# EAGLE board X_Driver (EAGLE 6.1)
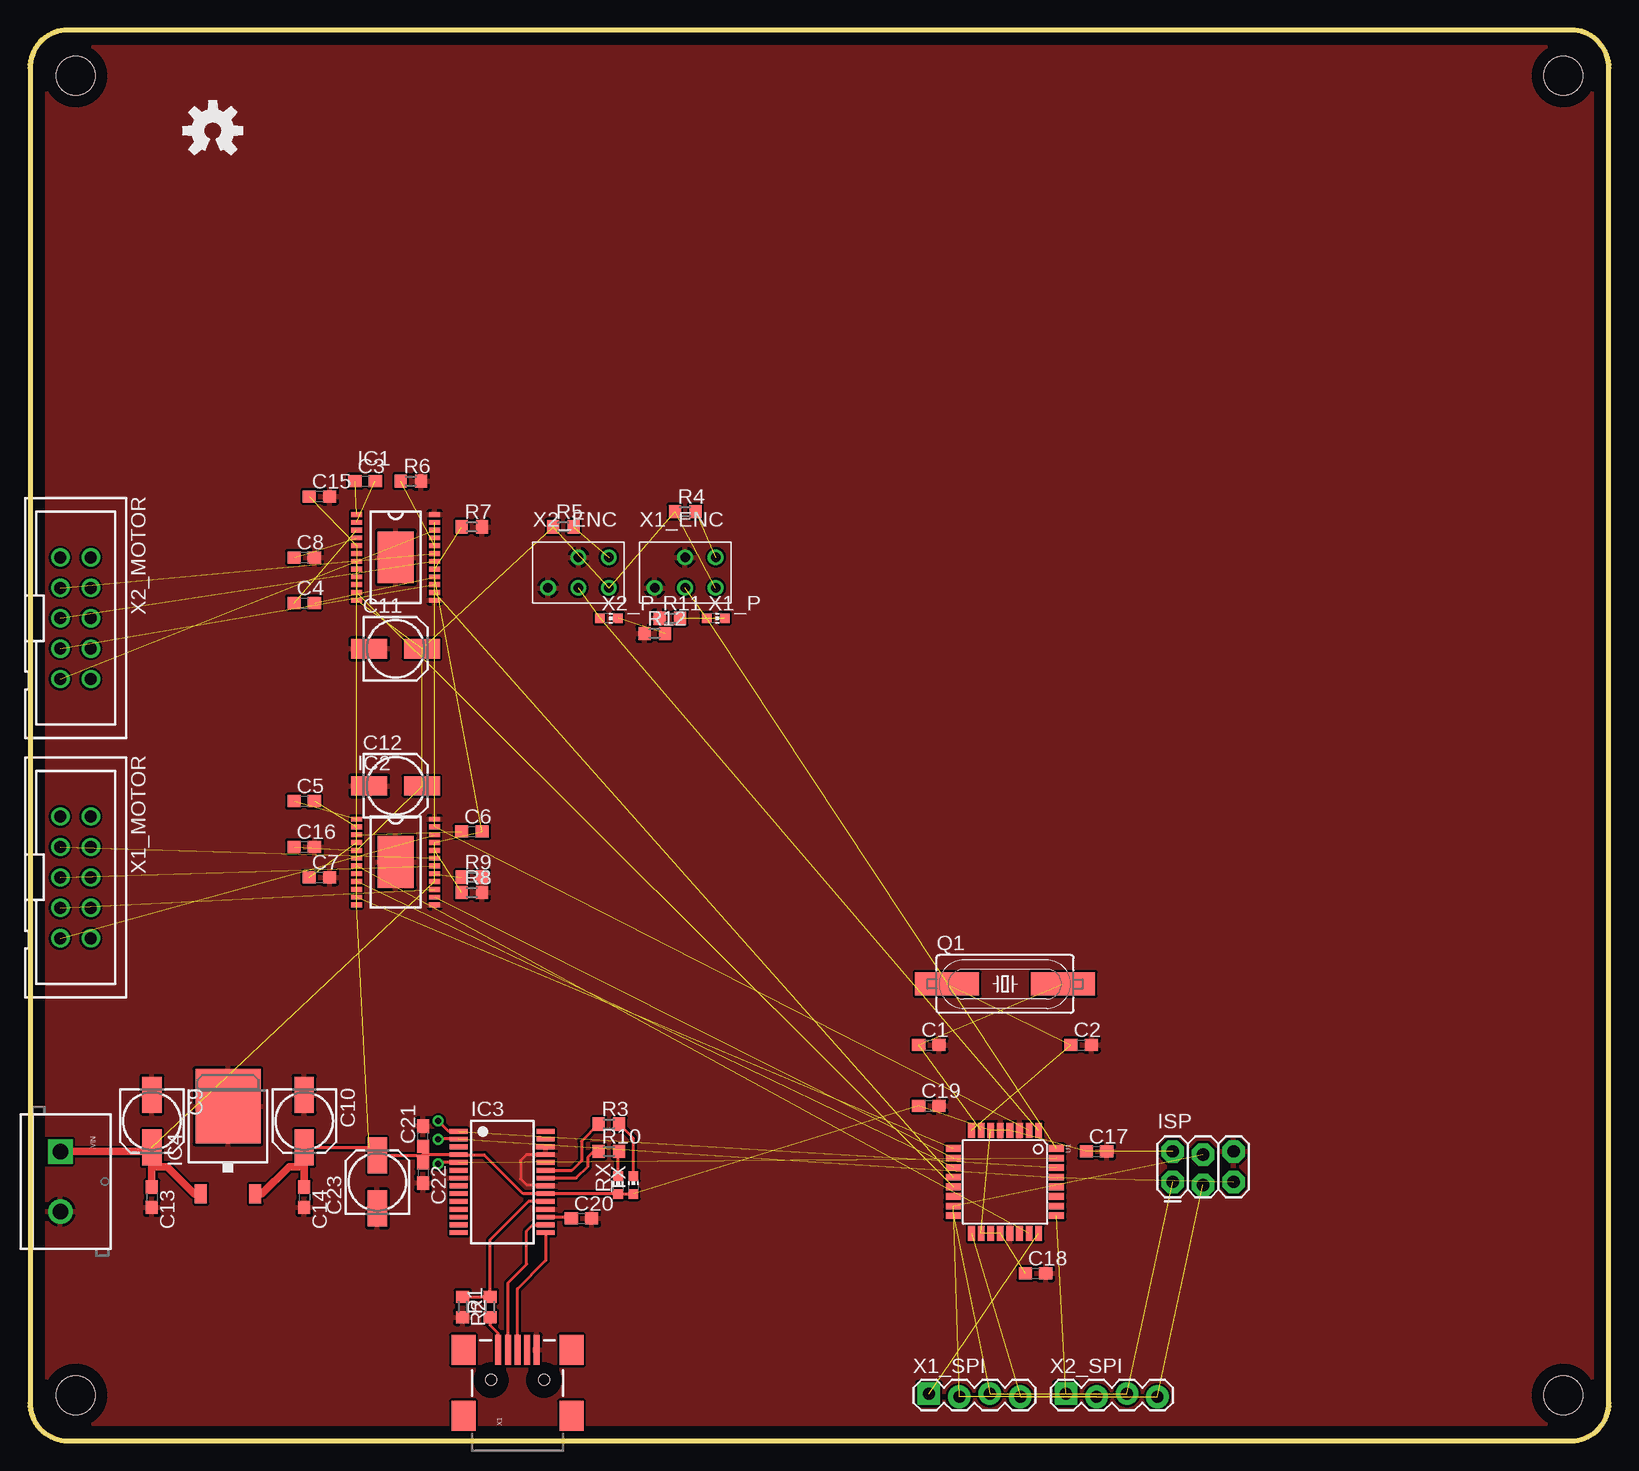
[diagram p0: board, top side]
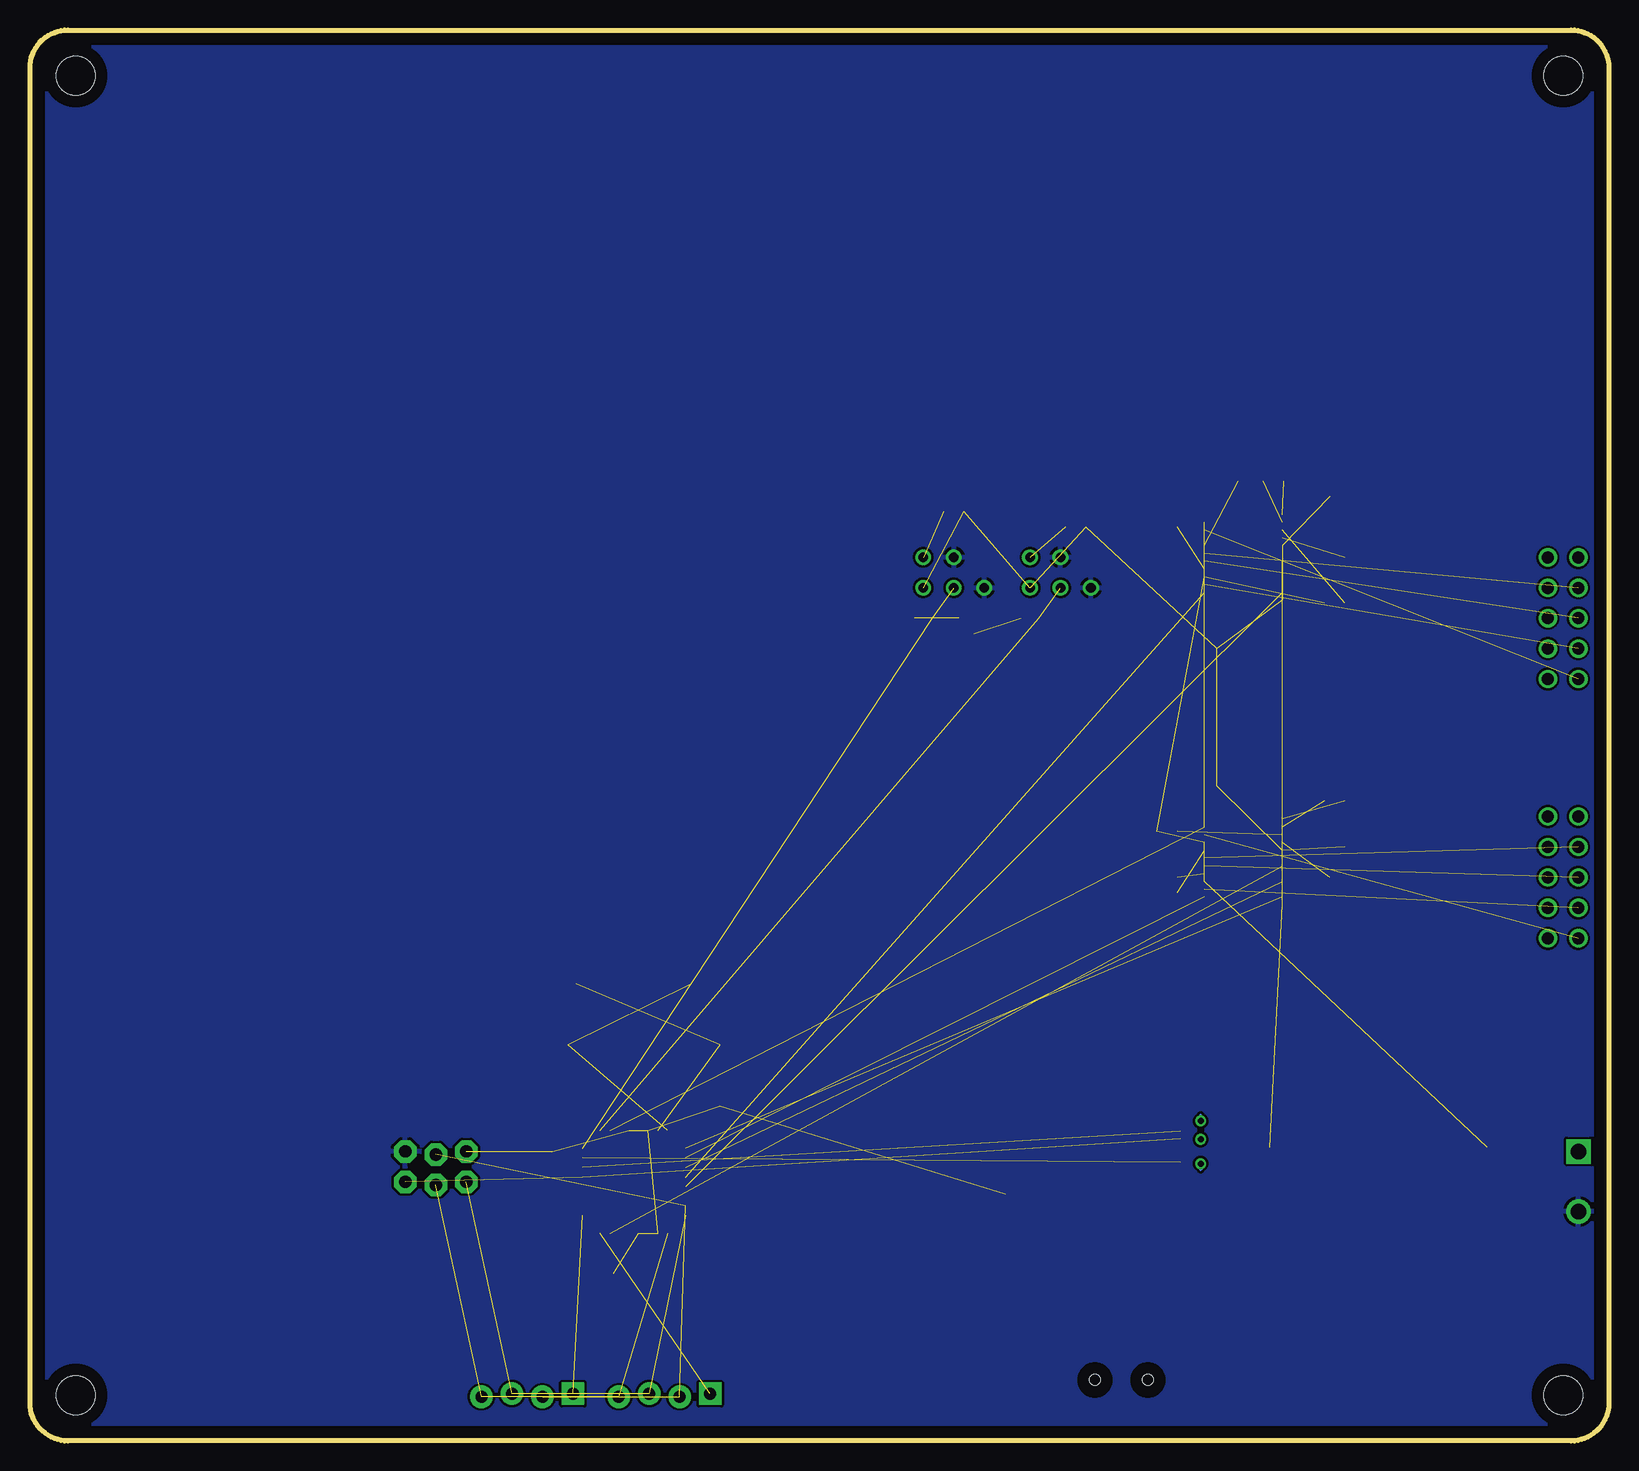
[diagram p1: board, bottom side, seen from below]

Size 131.62 x 117.62 mm. Coordinates in mm from the lower left corner, seen from the top.
Outline: 0,114.44 0,3.17 arc90 3.17,0 128.44,0 arc90 131.62,3.17 131.62,114.44 arc90 128.44,117.62 3.17,117.62 arc90 0,114.44
Copper layers (1*16): Top 0.035mm / dielectric 1.5mm / Bottom 0.035mm
Design rules: minimum track width 10mil, minimum drill 24mil, track to track 8mil, track to pad 8mil, pad to pad 8mil, via to via 8mil, smd to smd 8mil, copper to edge 40mil, drill to drill 8mil, minimum pad ring 10mil, minimum via ring 8mil, stop-mask expansion 4mil, vias tented up to drill 0mil, thermal gap 10mil
Holes 3.2 mm at 3.81,3.81 127.81,3.81 3.81,113.81 127.81,113.81

## Footprints (pad centres in the part's own frame; a part is rotated, then mirrored left to right if it is on the bottom)
C0603 = smd 1.1 x 1: 1 -0.85,0; 2 0.85,0
153CLV-0505 = smd 3 x 1.6: + 2.2,0; - -2.2,0
24TSSOP = smd 0.9 x 0.4: 1 -3.25,3.575; 2 -3.25,2.925; 3 -3.25,2.275; 4 -3.25,1.625; 5 -3.25,0.975; 6 -3.25,0.325; 7 -3.25,-0.325; 8 -3.25,-0.975; 9 -3.25,-1.625; 10 -3.25,-2.275; 11 -3.25,-2.925; 12 -3.25,-3.575; 13 3.25,-3.575; 14 3.25,-2.925; 15 3.25,-2.275; 16 3.25,-1.625; 17 3.25,-0.975; 18 3.25,-0.325; 19 3.25,0.325; 20 3.25,0.975; 21 3.25,1.625; 22 3.25,2.275; 23 3.25,2.925; 24 3.25,3.575 | smd 3 x 4.32: 25 0,0
SSOP28 = smd 0.4 x 1.5: 1 -4.225,-3.625; 2 -3.575,-3.625; 3 -2.925,-3.625; 4 -2.275,-3.625; 5 -1.625,-3.625; 6 -0.975,-3.625; 7 -0.325,-3.625; 8 0.325,-3.625; 9 0.975,-3.625; 10 1.625,-3.625; 11 2.275,-3.625; 12 2.925,-3.625; 13 3.575,-3.625; 14 4.225,-3.625; 15 4.225,3.625; 16 3.575,3.625; 17 2.925,3.625; 18 2.275,3.625; 19 1.625,3.625; 20 0.975,3.625; 21 0.325,3.625; 22 -0.325,3.625; 23 -0.975,3.625; 24 -1.625,3.625; 25 -2.275,3.625; 26 -2.925,3.625; 27 -3.575,3.625; 28 -4.225,3.625
TO252 = smd 1 x 1.6: 1 -2.28,-4.8; 2 2.28,-4.8 | smd 5.4 x 6.2: 3 0,2.5
2X3_LOCK = drill 1.016 pad 1.88 octagon: 1 0,0; 2 0,2.54; 3 2.54,-0.254; 4 2.54,2.286; 5 5.08,0; 6 5.08,2.54
HC49UP = smd 5.334 x 1.93: 1 -4.826,0; 2 4.826,0
R0603 = smd 1 x 1.1: 1 -0.85,0; 2 0.85,0
CHIP-LED0603 = smd 0.8 x 0.8: A 0,-0.75; C 0,0.75
TQFP32-08 = smd 1.27 x 0.559: 1 -4.293,2.8; 2 -4.293,2; 3 -4.293,1.2; 4 -4.293,0.4; 5 -4.293,-0.4; 6 -4.293,-1.2; 7 -4.293,-2; 8 -4.293,-2.8; 17 4.293,-2.8; 18 4.293,-2; 19 4.293,-1.2; 20 4.293,-0.4; 21 4.293,0.4; 22 4.293,1.2; 23 4.293,2; 24 4.293,2.8 | smd 0.559 x 1.27: 9 -2.8,-4.293; 10 -2,-4.293; 11 -1.2,-4.293; 12 -0.4,-4.293; 13 0.4,-4.293; 14 1.2,-4.293; 15 2,-4.293; 16 2.8,-4.293; 25 2.8,4.293; 26 2,4.293; 27 1.2,4.293; 28 0.4,4.293; 29 -0.4,4.293; 30 -1.2,4.293; 31 -2,4.293; 32 -2.8,4.293
SCREWTERMINAL-5MM-2 = drill 1.3 pad 2.032 square: 1 0,0 | drill 1.3 pad 2.032: 2 5,0
USB-MINIB = smd 2.5 x 0.5: D+ 2.5,0; D- 2.5,0.8; GND 2.5,-1.6; ID 2.5,-0.8; VBUS 2.5,1.6 | smd 2.5 x 2: MTN1 -3,4.5; MTN2 2.5,4.5; MTN3 -3,-4.5; MTN4 2.5,-4.5 | hole 0.9: 0,2.2; 0,-2.2
OPB990P51 = drill 0.8: 2 -2.54,-1.27; 3 0,1.27; 4 0,-1.27; 5 2.54,1.27; 6 2.54,-1.27
2X5_SHROUDED = drill 1 pad 1.422: 1 -5.08,-1.27; 2 -5.08,1.27; 3 -2.54,-1.27; 4 -2.54,1.27; 5 0,-1.27; 6 0,1.27; 7 2.54,-1.27; 8 2.54,1.27; 9 5.08,-1.27; 10 5.08,1.27
1X04_LOCK = drill 1.016 pad 1.88 square: 1 0,0.127 | drill 1.016 pad 1.88: 2 2.54,-0.127; 3 5.08,0.127; 4 7.62,-0.127

## Placement (x,y rotation side)
C1  20pF  [C0603]  74.93,33.02 0 top
C2  20pF  [C0603]  87.63,33.02 0 top
C3  0.1uF  [C0603]  27.94,80.01 0 top
C4  0.1uF  [C0603]  22.86,69.85 0 top
C5  0.1uF  [C0603]  22.86,53.34 0 top
C6  0.1uF  [C0603]  36.83,50.8 0 top
C7  0.22uF  [C0603]  24.13,46.99 0 top
C8  0.22uF  [C0603]  22.86,73.66 0 top
C9  100uF  [153CLV-0505]  10.16,26.67 270 top
C10  100uF  [153CLV-0505]  22.86,26.67 270 top
C11  100uF  [153CLV-0505]  30.48,66.04 0 top
C12  100uF  [153CLV-0505]  30.48,54.61 0 top
C13  0.1uF  [C0603]  10.16,20.32 270 top
C14  0.1uF  [C0603]  22.86,20.32 270 top
C15  0.1uF  [C0603]  24.13,78.74 0 top
C16  0.1uF  [C0603]  22.86,49.53 0 top
C17  0.1uF  [C0603]  88.9,24.13 0 top
C18  0.1uF  [C0603]  83.82,13.97 0 top
C19  0.1uF  [C0603]  74.93,27.94 0 top
C20  0.1uF  [C0603]  45.97,18.54 0 top
C21  0.1uF  [C0603]  32.77,25.4 90 top
C22  0.1uF  [C0603]  32.77,22.35 270 top
C23  4.7uF  [153CLV-0505]  28.96,21.59 90 top
IC1  A4982  [24TSSOP]  30.48,73.66 0 top
IC2  A4982  [24TSSOP]  30.48,48.26 0 top
IC3  FT232RL  [SSOP28]  39.37,21.59 270 top
IC4  7805DT  [TO252]  16.51,25.4 0 top
ISP  AVR_SPI_PRG_62X3_LOCK  [2X3_LOCK]  95.25,21.59 0 top
Q1  20MHz  [HC49UP]  81.28,38.1 0 top
R1  4.7k  [R0603]  38.35,11.18 90 top
R2  10k  [R0603]  36.07,11.18 270 top
R3  270  [R0603]  48.26,26.42 0 top
R4  220  [R0603]  54.61,77.47 0 top
R5  220  [R0603]  44.45,76.2 0 top
R6  1ohm 0.25W  [R0603]  31.75,80.01 0 top
R7  1ohm 0.25W  [R0603]  36.83,76.2 0 top
R8  1ohm 0.25W  [R0603]  36.83,45.72 0 top
R9  1ohm 0.25W  [R0603]  36.83,46.99 0 top
R10  270  [R0603]  48.26,24.13 0 top
R11  270  [R0603]  53.34,68.58 0 top
R12  270  [R0603]  52.07,67.31 0 top
RX  red  [CHIP-LED0603]  49.02,21.34 0 top
TX  green  [CHIP-LED0603]  50.29,21.34 0 top
U1  ATMEGA168  [TQFP32-08]  81.28,21.59 270 top
U$1  OSHW-LOGOM  [OSHW-LOGO-M]  15.24,109.22 0 top
VIN  [SCREWTERMINAL-5MM-2]  2.54,24.13 270 top
X1  USBSMD  [USB-MINIB]  40.64,5.08 90 top
X1_ENC  OPB990P51  [OPB990P51]  54.61,72.39 0 top
X1_MOTOR  X_STEPPER  [2X5_SHROUDED]  3.81,46.99 270 top
X1_P  yellow  [CHIP-LED0603]  57.15,68.58 270 top
X1_SPI  [1X04_LOCK]  74.93,3.81 0 top
X2_ENC  OPB990P51  [OPB990P51]  45.72,72.39 0 top
X2_MOTOR  X_STEPPER  [2X5_SHROUDED]  3.81,68.58 270 top
X2_P  yellow  [CHIP-LED0603]  48.26,68.58 270 top
X2_SPI  [1X04_LOCK]  86.36,3.81 0 top

## Library data of the parts
C1-C23 R1-R12 = rcl
IC1 IC2 X1_ENC X1_MOTOR X2_ENC X2_MOTOR = i3_Pick_Place
IC3 = ftdichip; MPN: FT232RL; OC_FARNELL: 1146032; OC_NEWARK: 91K9918
IC4 = linear
ISP U1 U$1 VIN X1 X1_SPI X2_SPI = SparkFun
Q1 = crystal; OC_FARNELL: unknown; OC_NEWARK: unknown
RX TX X1_P X2_P = adafruit

## Nets
12VDC: C4.2 C6.2 C9.+ C13.1 IC1.16 IC1.21 IC2.16 IC2.21 IC4.1 VIN.1
GND: C1.2 C2.2 C7.2 C8.2 C9.- C10.- C11.- C12.- C13.2 C14.2 C15.2 C16.2 C17.2 C18.2 C19.2 C20.2 C21.2 C22.2 C23.- IC1.13 IC1.24 IC1.25 IC2.13 IC2.24 IC2.25 IC3.7 IC3.18 IC3.21 IC3.25 IC3.26 IC4.3 ISP.6 R2.2 R6.2 R7.2 R8.2 R9.2 R11.1 R12.1 U1.3 U1.5 U1.21 VIN.2 X1.GND X1_ENC.2 X1_ENC.3 X2_ENC.2 X2_ENC.3
MEN: IC1.23 IC2.23 U1.2
MISO: ISP.1 U1.16 X1_SPI.3 X2_SPI.3
MOSI: ISP.4 U1.15 X1_SPI.2 X2_SPI.2
MRST: IC1.7 IC2.7 U1.23
MSLP: IC1.9 IC2.9 U1.11
N$1: C1.1 Q1.2 U1.7
N$2: C2.1 Q1.1 U1.8
N$3: C20.1 IC3.17
N$4: IC3.19 R1.2 R2.1
N$5: R1.1 X1.VBUS
N$6: R4.2 X1_ENC.5
N$7: R5.2 X2_ENC.5
N$8: IC1.18 X2_MOTOR.5
N$9: U1.1 X2_ENC.4 X2_P.A
N$10: U1.32 X1_ENC.4 X1_P.A
N$11: IC3.16 X1.D-
N$12: C5.1 IC2.1
N$13: C5.2 IC2.2
N$14: C3.1 IC1.1
N$15: C3.2 IC1.2
N$16: C4.1 IC1.3
N$17: IC1.15 X2_MOTOR.7
N$18: C6.1 IC2.3
N$19: IC1.19 X2_MOTOR.3
N$20: C8.1 IC1.4
N$21: C7.1 IC2.4
N$22: IC1.22 X2_MOTOR.9
N$23: IC2.18 X1_MOTOR.5
N$24: IC2.15 X1_MOTOR.7
N$25: IC2.22 X1_MOTOR.9
N$26: IC2.19 X1_MOTOR.3
N$27: IC3.15 X1.D+
N$28: IC3.23 R3.1
N$29: IC1.20 R6.1
N$30: IC1.17 R7.1
N$31: IC2.20 R8.1
N$32: IC2.17 R9.1
N$33: IC3.22 R10.1
N$34: R3.2 TX.C
N$35: R10.2 RX.C
N$36: R11.2 X1_P.C
N$37: R12.2 X2_P.C
RESET: IC3.2 ISP.5 U1.29
RX: IC3.1 U1.30
SCK: ISP.3 U1.17 X1_SPI.4 X2_SPI.4
TX: IC3.5 U1.31
VCC: C10.+ C11.+ C12.+ C14.1 C15.1 C16.1 C17.1 C18.1 C19.1 C21.1 C22.1 C23.+ IC1.5 IC1.6 IC1.8 IC1.10 IC1.12 IC2.5 IC2.6 IC2.8 IC2.10 IC2.12 IC3.4 IC3.20 IC4.2 ISP.2 R4.1 R5.1 RX.A TX.A U1.4 U1.6 U1.18 U1.20 X1_ENC.6 X2_ENC.6
X1CS: U1.24 X1_SPI.1
X1DIR: IC2.14 U1.10
X1STP: IC2.11 U1.9
X2CS: U1.25 X2_SPI.1
X2DIR: IC1.14 U1.12
X2STP: IC1.11 U1.13

## Tracks (layer width: path | path; a pad name or v marks a point on that pad's centre or on a via)
12VDC  (6 unrouted)
  Top 0.61: VIN.1 10.16,24.13 | 10.16,24.13 C9.+ | 10.16,24.13 10.16,22.86 | 10.16,22.86 C13.1 | IC4.1 13.69,20.6 11.43,22.86 10.16,22.86
GND
  Top 0.254: IC3.25 41.39,23.86 40.89,23.37 40.89,21.84 41.4,21.34 42.92,21.34 IC3.21
  pour Bottom: 0,0 132.08,0 132.08,118.11 0,118.11
  pour Top: 0,0 132.08,0 132.08,118.11 0,118.11
MEN  (2 unrouted)
MISO  (3 unrouted)
MOSI  (3 unrouted)
MRST  (2 unrouted)
MSLP  (2 unrouted)
N$1  (2 unrouted)
N$2  (2 unrouted)
N$3
  Top 0.254: IC3.17 45,18.66 C20.1
N$4
  Top 0.254: R2.1 R1.2 38.35,16.76 41.55,19.96 IC3.19
N$5
  Top 0.254: X1.VBUS 39.04,8.97 38.35,9.65 R1.1
N$6  (1 unrouted)
N$7  (1 unrouted)
N$8  (1 unrouted)
N$9  (2 unrouted)
N$10  (2 unrouted)
N$11
  Top 0.254: X1.D- 39.84,13.17 41.4,14.73 41.4,17.53 41.91,18.03 42.98,18.03 IC3.16
N$12  (1 unrouted)
N$13  (1 unrouted)
N$14  (1 unrouted)
N$15  (1 unrouted)
N$16  (1 unrouted)
N$17  (1 unrouted)
N$18  (1 unrouted)
N$19  (1 unrouted)
N$20  (1 unrouted)
N$21  (1 unrouted)
N$22  (1 unrouted)
N$23  (1 unrouted)
N$24  (1 unrouted)
N$25  (1 unrouted)
N$26  (1 unrouted)
N$27
  Top 0.254: X1.D+ 40.64,12.7 42.99,15.05 IC3.15
N$28
  Top 0.254: IC3.23 45.17,22.57 45.97,23.37 45.97,24.98 R3.1
N$29  (1 unrouted)
N$30  (1 unrouted)
N$31  (1 unrouted)
N$32  (1 unrouted)
N$33
  Top 0.254: R10.1 46.99,24.13 46.48,23.62 46.48,22.86 45.54,21.91 IC3.22
N$34
  Top 0.254: TX.C 50.29,25.23 R3.2
N$35
  Top 0.254: RX.C 49.02,24.04 R10.2
N$36  (1 unrouted)
N$37  (1 unrouted)
RESET  (via drill 0.5)  (2 unrouted)
  Top 0.254: IC3.2 34.05,25.16 v34.04,25.15
  Bottom 0.254: v34.04,25.15 34.04,25.4
RX  (via drill 0.5)  (1 unrouted)
  Top 0.254: IC3.1 34.89,25.82 v34.04,26.67
  Bottom 0.254: v34.04,26.67 34.04,27.18
SCK  (3 unrouted)
TX  (via drill 0.5)  (1 unrouted)
  Top 0.254: IC3.5 34.14,23.21 v34.04,23.11
  Bottom 0.254: v34.04,23.11 34.04,22.61
VCC  (26 unrouted)
  Top 0.254: C10.+ 28.28,24.47 C23.+ 32.68,23.79 32.77,23.88 | C21.1 32.77,23.88 | 32.77,23.88 C22.1 | 32.77,23.88 35.73,23.88 IC3.4 37.86,23.86 41.11,20.61 IC3.20 43.02,20.59 RX.A TX.A
  Top 0.61: C10.+ 22.86,22.86 | 22.86,22.86 C14.1 | IC4.2 19.33,20.6 21.59,22.86 22.86,22.86
X1CS  (1 unrouted)
X1DIR  (1 unrouted)
X1STP  (1 unrouted)
X2CS  (1 unrouted)
X2DIR  (1 unrouted)
X2STP  (1 unrouted)